# Altium PCB 400532.PcbDoc
Units mm, origin at the board's own origin, x right, y up, seen from the top; angles counter-clockwise.
Board outline 17.88 x 49.28 mm, 2 copper layers (Top Layer, Bottom Layer), stack 1.001 mm thick; 11 components, 19 nets, 61 pads, 81 vias.
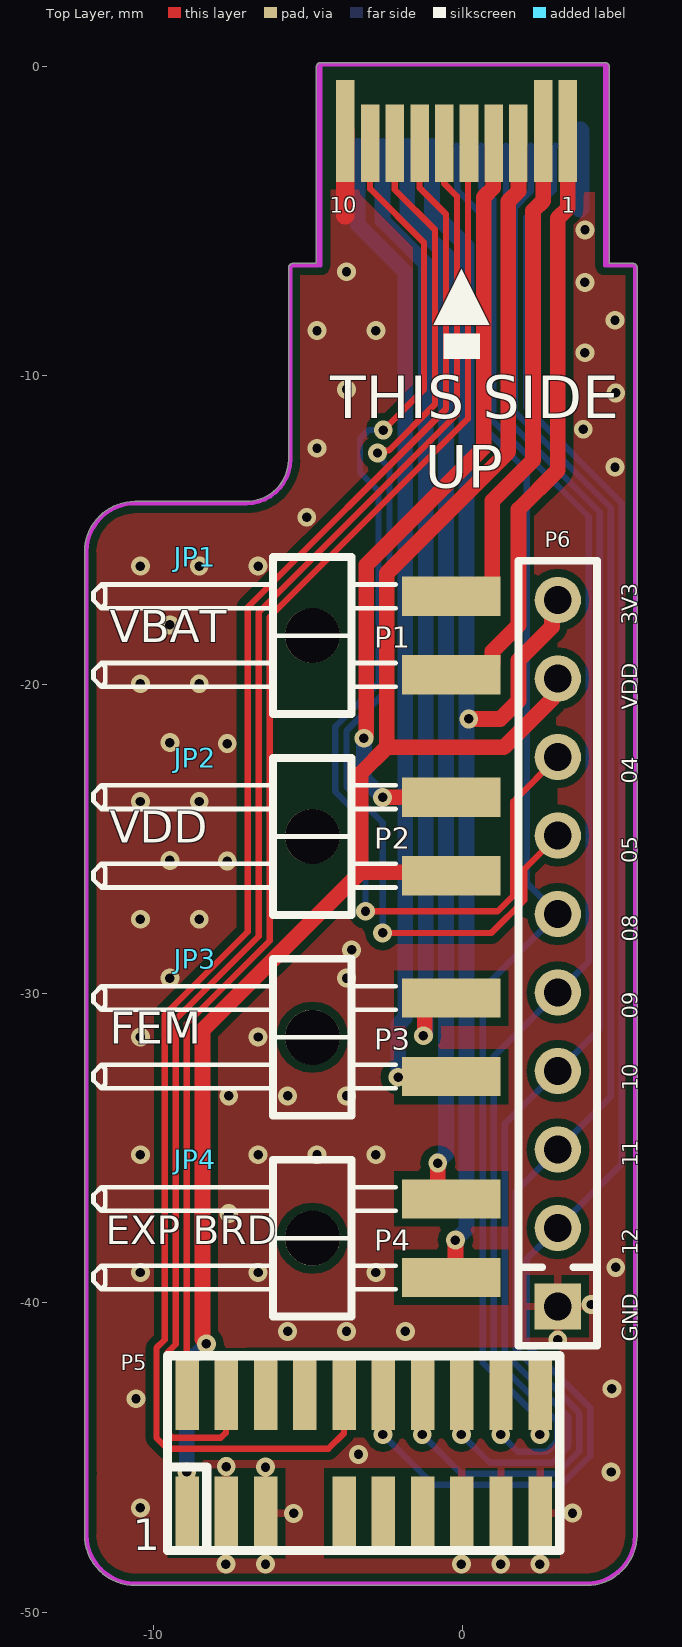
[diagram p0: Top Layer view]
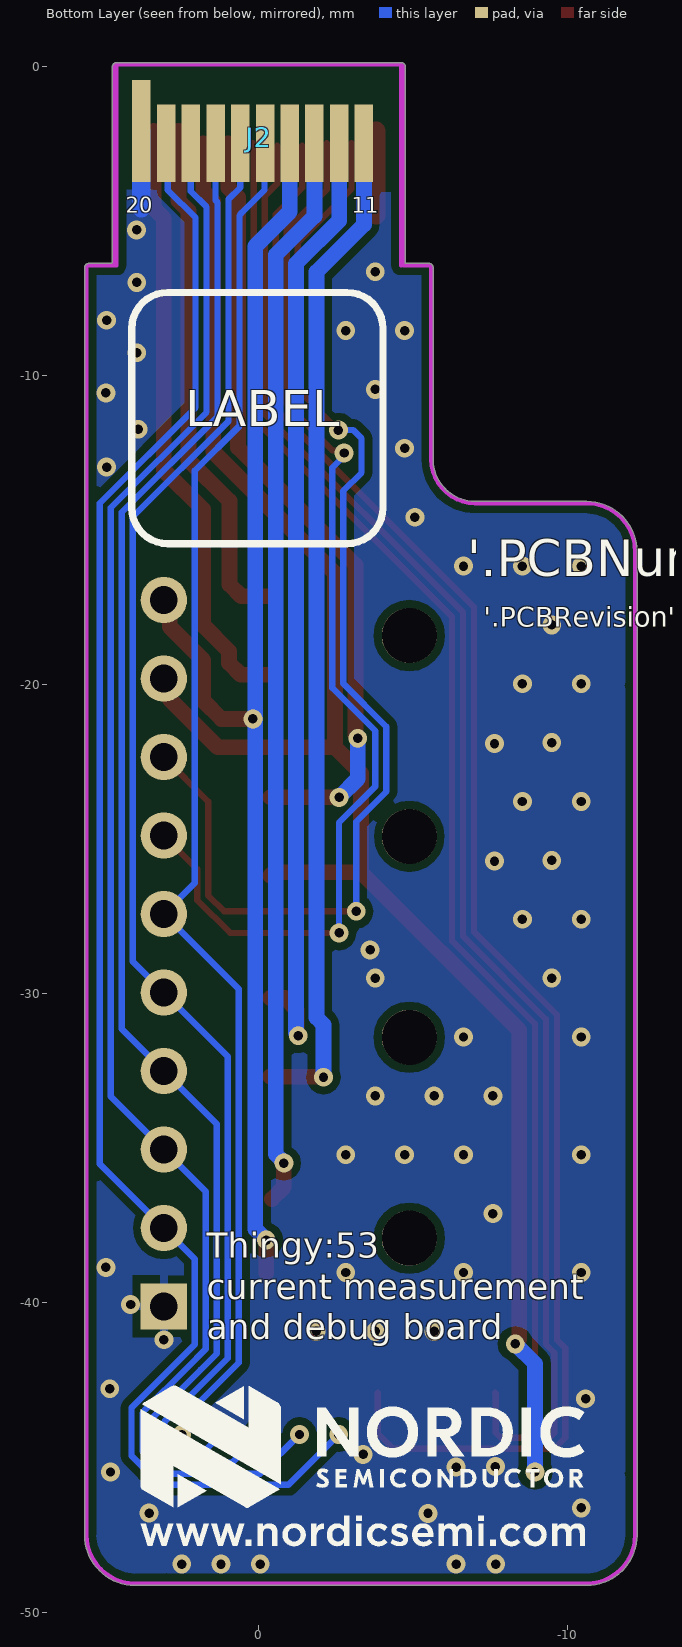
[diagram p1: Bottom Layer view, seen from below]
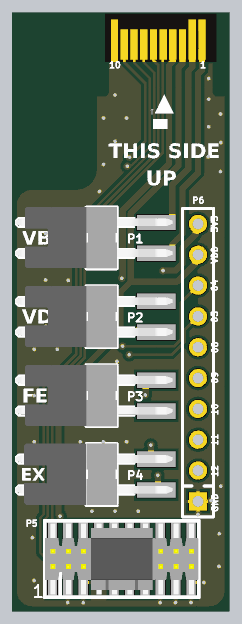
[diagram p2: 3D render of the assembled board from above, using the file's embedded part models]

## Layer stack, top to bottom
Top Solder: solder mask 0.0102, Solder Resist, Dk 3.5
Top Layer: signal copper 0.0356
Dielectric1: core 0.93, FR-4 Halogen Free, Dk 4.8
Bottom Layer: signal copper 0.0356
Bottom Solder: solder mask 0.0102, Solder Resist, Dk 3.5

## Board outline
-12.24,-47.511 cw(c-12.177,-47.506) -12.24,-47.506 -12.24,-15.694 cw(c-12.177,-15.694) -12.24,-15.689 cw(c-10.6,-15.7) -10.611,-14.06 cw(c-10.606,-14.123) -10.606,-14.06 -7,-14.06 cw(c-7,-14.123) -6.995,-14.06 cw(c-6.995,-14.124) -6.995,-14.06 ccw(c-7,-12.7) -5.64,-12.723 -5.64,-6.5 cw(c-5.5,-6.5) -5.5,-6.36 -4.74,-6.36 -4.74,0 cw(c-4.6,0) -4.6,0.14 4.6,0.14 cw(c4.6,0) 4.74,0 4.74,-6.36 5.5,-6.36 cw(c5.5,-6.5) 5.64,-6.5 5.64,-12.005 5.64,-47.506 cw(c5.577,-47.506) 5.64,-47.511 cw(c4,-47.5) 4.011,-49.14 cw(c4.006,-49.077) 4.006,-49.14 -10.591,-49.14 cw(c-10.591,-49.077) -10.599,-49.14 cw(c-10.606,-49.076) -10.606,-49.14 cw(c-10.6,-47.5)

## Design rules (kind name [scope] priority, off if disabled: settings)
Clearance ANT_Clerance [InNet('ANT')] p1: gap=0.127 ignorepadtopadclearanceinfootprint=FALSE except(0: Arc-Hole Track-Hole SMDPad-Hole THPad-Hole Via-Hole Fill-Hole Poly-Hole Region-Hole Text-Hole)
Clearance Polygon_Clearance [(InNamedPolygon('Top_Layer-GND')) or (InNamedPolygon('Bottom_Layer-GND'))] p2: gap=0.254 ignorepadtopadclearanceinfootprint=FALSE except(0: Arc-Hole Track-Hole SMDPad-Hole THPad-Hole Via-Hole Fill-Hole Poly-Hole Region-Hole Text-Hole)
Clearance [All] p3: gap=0.152 ignorepadtopadclearanceinfootprint=FALSE except(0: Arc-Hole Track-Hole SMDPad-Hole THPad-Hole Via-Hole Fill-Hole Poly-Hole Region-Hole Text-Hole)
ComponentClearance [All] p1 off: gap=0.254 collisioncheckmode=3 verticalgap=0.254 showdistances=FALSE
DiffPairsRouting [All] p1: maxlimit=0.15 minlimit=0.15 mostfreqgap=0.15 toplayer_minwidth=0.381 toplayer_maxwidth=0.381 toplayer_prefwidth=0.381 bottomlayer_minwidth=0.381 bottomlayer_maxwidth=0.381 bottomlayer_prefwidth=0.381 maxuncoupledlength=12.7
FabricationTestPointUsage TestPointUsage [All] p1: valid=0 allowmultiple=FALSE
FabricationTestpoint Testpoint [All] p1: side=3 testpointundercomponent=TRUE minsize=1.016 maxsize=2.54 preferedsize=1.524 minholesize=0 maxholesize=1.016 preferedholesize=0.813 testpointgrid=0.025 allowsidetop=TRUE allowsidebottom=TRUE usegrid=TRUE gridtolerance=0
Height [All] p1 off: minheight=0 maxheight=25.4 prefheight=12.7
HoleSize [All] p1: absolutevalues=TRUE maxlimit=5 minlimit=0.305 maxpercent=80.000 minpercent=20.000
MinimumAnnularRing [All] p1 off: minimumring=0.152
PolygonConnect PolygonConnect_1 [isVia and innet(gnd)] p1: connectstyle=Direct reliefconductorwidth=0.254 reliefentries=4 polygonreliefangle="90 Angle" airgapwidth=0.254
PolygonConnect [All] p2: connectstyle=Relief reliefconductorwidth=0.254 reliefentries=4 polygonreliefangle="90 Angle" airgapwidth=0.254
RoutingVias [All] p1: holewidth=0.305 width=0.61 viastyle="Through Hole" minholewidth=0.305 minwidth=0.61 maxholewidth=0.305 maxwidth=0.61
SilkToSolderMaskClearance SilkscreenOverComponentPads [IsPad] p1: minsilkscreentomaskgap=0.254 clearancetoexposedcopper=TRUE
SolderMaskExpansion [All] p1: expansion=0.076 istentingtop=FALSE
Width [All] p1: maxlimit=2.54 minlimit=0.203 preferedwidth=0.381
23 further rules are at their usual default settings.

## Components (designator, comment, footprint, x,y, rotation, side; value= is the part's Value field where it differs from the comment)
J2 "Card Edge, 0.8mm" "10056847-101LF Mating Board" 0,0.075 r180 bottom locked
JP1 "Shunt 2.54mm" Shunt_2.54mm_Horizontal -8.65,-15.863 r270 top locked
JP2 "Shunt 2.54mm" Shunt_2.54mm_Horizontal -8.65,-22.363 r270 top locked
JP3 "Shunt 2.54mm" Shunt_2.54mm_Horizontal -8.65,-28.863 r270 top locked
JP4 "Shunt 2.54mm" Shunt_2.54mm_Horizontal -8.65,-35.363 r270 top locked
P1 "Pin List 1x2, Angled" LIST_ANG_1x2-SMD-2.54MM -0.372,-18.403 r270 top locked
P2 "Pin List 1x2, Angled" LIST_ANG_1x2-SMD-2.54MM -0.372,-24.903 r270 top locked
P3 "Pin List 1x2, Angled" LIST_ANG_1x2-SMD-2.54MM -0.372,-31.403 r270 top locked
P4 "Pin List 1x2, Angled" LIST_ANG_1x2-SMD-2.54MM -0.372,-37.903 r270 top locked
P5 "Pin Header 2x10, 1.27mm, SWD" HDR_2x10-SMD-1.27mm-K-SWD -3.209,-44.859 r0 top locked
P6 "Pin List 1x10" LIST_1x10-NC 3.074,-28.683 r90 top locked

## Footprints (in the part's own frame and the unit in brackets; to place one, negate y for a bottom-side part, rotate by r counter-clockwise, add the part's x,y. Pads: shape width x height; smd on the part's side, far side on the other; paste and mask are expansions set on the pad)
"10056847-101LF Mating Board" [mm]
  rect 0.6x3.3 smd far side paste-1 mask+0.025: 1(-3.4,-2.15) 2(-2.6,-2.15) 10(3.8,-2.15)
  rect 0.6x2.5 smd far side paste-1 mask+0.025: 3(-1.8,-2.55) 4(-1,-2.55) 5(-0.2,-2.55) 6(0.6,-2.55) 7(1.4,-2.55) 8(2.2,-2.55) 9(3,-2.55)
  rect 0.6x2.5 smd paste-1 mask+0.025: 11(3.4,-2.55) 12(2.6,-2.55) 13(1.8,-2.55) 14(1,-2.55) 15(0.2,-2.55) 16(-0.6,-2.55) 17(-1.4,-2.55) 18(-2.2,-2.55) 19(-3,-2.55)
  rect 0.6x3.3 smd paste-1 mask+0.025: 20(-3.8,-2.15)
  Keep-Out Layer lines w0.127: 4.6,-6.5 4.6,0 -4.6,0 -4.6,-6.5
HDR_2x10-SMD-1.27mm-K-SWD [mm] "SMT MICRO HEADER, (1,27) .050\" Keying Shroud w/ pin 7 removed"
  rect 0.76x2.4 smd: 1(-5.715,-1.95) 2(-5.715,1.95) 3(-4.445,-1.95) 4(-4.445,1.95) 5(-3.175,-1.95) 6(-3.175,1.95) 8(-1.905,1.95) 9(-0.635,-1.95) 10(-0.635,1.95) 11(0.635,-1.95) 12(0.635,1.95) 13(1.905,-1.95) 14(1.905,1.95) 15(3.175,-1.95) 16(3.175,1.95) 17(4.445,-1.95) 18(4.445,1.95) 19(5.715,-1.95) 20(5.715,1.95)
  silkscreen extent -6.35,-3.15 6.35,3.15, body extent -6.31,-2.92 6.31,2.92, height 6.98
LIST_1x10-NC [mm] "Pin List, 2.54mm through hole"
  rect 1.5x1.5 hole 0.9: 1(-11.43,0)
  round 1.5 hole 0.9: 2(-8.89,0) 3(-6.35,0) 4(-3.81,0) 5(-1.27,0) 6(1.27,0) 7(3.81,0) 8(6.35,0) 9(8.89,0) 10(11.43,0)
  silkscreen extent -12.7,-1.27 12.7,1.27
LIST_ANG_1x2-SMD-2.54MM [mm] "Pin List, 2.54mm, Surface Mount, Angled"
  round 1.78 hole 1.78 unplated: 0(0,-4.496)
  rect 1.27x3.18 smd: 1(-1.27,0) 2(1.27,0)
  silkscreen extent -2.54,-11.58 2.54,-1.8, body extent -2.56,-11.61 2.52,1.35, height 3.03
Shunt_2.54mm_Horizontal [mm]
  body extent 0,-2.54 5.03,2.54, height 3.09

## Part data
J2: library part "10056847-101LF Mating Board", "0.8mm pitch, dual edge, card edge connector", Manufacturer=N.A., Artikkelnr Noca=N.A., Component Class=Connectors, ComponentLink1Description=Datasheet, ComponentLink1URL=https://www.amphenol-icc.com/media/wysiwyg/files/drawing/10056847.pdf, ComponentLink2Description="Supplier link", ComponentLink2URL=N.A., Footprint Doc="10056847-101LF Mating Board", HelpURL=N.A., LatestRevisionDate=2018-05-09, Manufacturer Part Number=N.A., Note=N.A., Pad Count=20, Part Number="10056847-101LF Mating Board", Part number IPS=N.A., PartId=100500634, Published=2018-05-09, Supplier 1=N.A., Supplier 2=N.A., Supplier Part Number 1=N.A., Supplier Part Number 2=N.A.
JP1 JP2 JP3 JP4: library part "SHUNT JUMPER 2.54mm Black Tin", "Shunt Jumper 2.54mm Black, open top", Manufacturer=Samtec, Manufacturer Part Number=SNT-100-BK-T, Part number IPS=N.A., Supplier Part Number 1=SAM8860-ND, Artikkelnr Noca=N.A., Author=masi, Component Class=Connectors, ComponentLink1Description=Datasheet, ComponentLink1URL=N.A., ComponentLink2Description="Supplier link", ComponentLink2URL=N.A., Footprint Doc="SHUNT JUMPER 2.54mm", HelpURL=http://suddendocs.samtec.com/catalog_english/snt.pdf, LatestRevisionDate=2021-06-28, Note="SHUNT JUMPER .1\" BLACK TIN, h=6.10mm, w=5.08mm", Pad Count=2, Part Number="SHUNT JUMPER 2.54mm Black Tin", Part number Norautron=N.A., Published=2021-06-28, Supplier 1=Digi-Key, Supplier 2=Mouser, Supplier Part Number 2=200-SNT100BKT
P1 P2 P3 P4: library part "Pin List Ang 1x2 SMD, 2.54mm", "Pin List 1x2, 2.54mm (100mil), Right Angled, SMD", Manufacturer=W-CON, Manufacturer Part Number=1125B-1102S0Z135R2, Part number IPS=00000009972, Artikkelnr Noca=55010023, Component Class=Connectors, ComponentLink1Description=Datasheet, ComponentLink1URL=N.A., ComponentLink2Description="Supplier link", ComponentLink2URL=N.A., Footprint Doc=LIST_ANG_1x2-SMD-2.54MM, HelpURL=\\hizz\pro\app9717\Datasheet\connectors\W-CON\1125B-11XXXXZXXXXX.pdf, LatestRevisionDate=2016-05-26, Note=N.A., Pad Count=2, Part Number="Pin List Ang 1x2 SMD, 2.54mm", PartId=100500354, Published=2016-01-22, Supplier 1=Cabcon, Supplier 2=Samtec, Supplier Part Number 1=1125B-1102S0Z135R2, Supplier Part Number 2=TSM-102-01-L-SH-A
P5: library part "Pin Header 2x10 SMD, 1.27mm, KS, SWD", "Pin Header 2x10, 1.27mm (50mil), SMD, Keying Shroud, Removed Pin 7", Manufacturer=W-CON, Manufacturer Part Number=3132-20MS0BK00R1, Part number IPS=N.A., Artikkelnr Noca=N.A., Component Class=Connectors, ComponentLink1Description=Datasheet, ComponentLink1URL=N.A., ComponentLink2Description="Supplier link", ComponentLink2URL=N.A., Footprint Doc=HDR_2x10-SMD-1.27mm-SWD, HelpURL=N.A., LatestRevisionDate=2017-10-23, Note=N.A., Pad Count=20, Part Number="Pin Header 2x10 SMD, 1.27mm, KS, SWD", PartId=100500280, Published=2014-05-23, Supplier 1=Cabcon, Supplier 2=Digi-Key, Supplier Part Number 1=3132-20MS0BK00R1, Supplier Part Number 2=FTSH-110-01-F-DV-K-ND
P6: library part "Pin List 1x10, N.C.", "Pin List 1x10, 2.54mm (100mil)", Manufacturer=N.A., Artikkelnr Noca=N.A., Assembly="Not mounted", Component Class=Connectors, ComponentLink1Description=Datasheet, ComponentLink1URL=N.A., ComponentLink2Description="Supplier link", ComponentLink2URL=N.A., Footprint Doc=LIST_1x10, HelpURL=N.A., LatestRevisionDate=2017-10-23, Manufacturer Part Number=N.A., Note=N.A., Pad Count=10, Part Number="Pin List 1x10, N.C.", Part number IPS=N.A., PartId=100500336, Published=2017-10-23, Supplier 1=N.A., Supplier 2=N.A., Supplier Part Number 1=N.A., Supplier Part Number 2=N.A.

## Via types
v1: diameter 0.61, hole 0.305, Top Layer to Bottom Layer, tented both sides, 81 vias

## Nets (pads, with @x,y where several pads share a name; then routed paths per layer and width w, separated by ;. In a path a pad name is that pad's centre, name@x,y a point inside that pad or via, vN(x,y) a via of type N, cw(c..) or ccw(c..) an arc to the next point about the centre after c; other vN are vias at no path point)
3V3: J2.14 P4.2 P6.10 | length 42.8
  Top Layer w0.508: P4.2@-0.238,-39.038 v1(-0.238,-37.965) ; v1@0.166,-21.1 1.213,-21.1 1.8,-20.513 1.8,-19.2 2.885,-18.115 2.885,-17.442 P6.10
  Bottom Layer w0.508: J2.14@-1,-2.55 -1,-4.69 0.118,-5.807 v1@0.118,-21.1 ; v1(-0.238,-37.965) 0.118,-37.61 0.118,-21.201 0.172,-21.147 0.172,-21.127 v1@0.144,-21.1
  other v1: 0.191,-21.1
GND: J2.10 J2.20 P5.3 P5.5 P5.15 P5.17 P5.19 P6.1 | length 5.2
  Top Layer w0.6: -3.8,-4.8 J2.10
  Bottom Layer w0.6: 3.8,-4.575 J2.20
  other v1: -7.664,-48.45 -6.384,-48.45 -0.044,-48.45 1.226,-48.45 2.494,-48.45 -5.475,-46.809 3.55,-46.8 -10.432,-46.633 4.8,-45.469 -6.384,-45.31 -7.654,-45.294 -3.375,-44.9 -10.575,-43.1 4.825,-42.775 3.074,-41.188 -5.67,-40.918 -3.765,-40.918 -1.86,-40.918 4.15,-40.05 -10.432,-39.013 -6.622,-39.013 -2.812,-39.013 4.95,-38.85 -7.575,-37.108 -10.432,-35.203 -6.622,-35.203 -4.717,-35.203 -2.812,-35.203 -7.575,-33.298 -5.67,-33.298 -3.765,-33.298 -10.432,-31.393 -6.622,-31.393 -9.48,-29.488 -3.765,-29.488 -3.6,-28.575 -10.432,-27.583 -8.527,-27.583 -7.625,-25.7 -9.48,-25.678 -10.432,-23.773 -8.527,-23.773 -7.625,-21.9 -9.48,-21.868 -10.432,-19.963 -8.527,-19.963 -9.48,-18.058 -10.432,-16.153 -8.527,-16.153 -6.622,-16.153 -5.05,-14.575 4.925,-12.95 -4.717,-12.343 3.9,-11.725 4.95,-10.55 -3.765,-10.438 3.952,-9.253 -4.717,-8.533 -2.812,-8.533 4.925,-8.2 3.95,-6.975 -3.765,-6.628 3.954,-5.275
P0.04/AIN0: J2.9 P6.8 | length 38
  Top Layer w0.203: v1(-3.15,-27.325) 1.125,-27.325 1.633,-26.817 1.633,-23.774 P6.8 ; J2.9 -3,-3.95 -1.256,-5.694 -1.256,-10.437 v1(-2.575,-11.755)
  Bottom Layer w0.203: v1(-3.15,-27.325) -3.15,-24.425 -4.125,-23.45 -4.125,-21.347 -2.731,-19.953 -2.731,-13.722 -3.325,-13.127 -3.325,-12.025 -3.05,-11.75 -2.58,-11.75 v1(-2.575,-11.755)
P0.05/AIN1: J2.8 P6.7 | length 35.8
  Top Layer w0.203: v1(-2.76,-12.495) -2.682,-12.417 -2.395,-12.417 -0.901,-10.923 -0.901,-5.274 -2.2,-3.975 J2.8 ; v1(-2.597,-28.025) 0.928,-28.025 1.989,-26.964 1.989,-25.958 P6.7
  Bottom Layer w0.203: v1(-2.76,-12.495) -2.76,-12.587 -2.375,-12.972 -2.375,-14.25 ; v1(-2.597,-28.025) -2.591,-28.019 -2.591,-24.459 -3.762,-23.287 -3.762,-21.487 -2.372,-20.097 -2.372,-14.25
P0.08/TRACEDATA3: J2.15 P5.20 P6.6 | length 44.8
  Bottom Layer w0.203: J2.15@-0.2,-2.55 -0.18,-2.57 -0.18,-3.986 0.566,-4.732 cw(c0.422,-4.875) 0.626,-4.875 0.626,-11.62 2.07,-13.064 2.07,-26.409 P6.6 0.648,-29.839 0.648,-41.932 1.608,-42.892 2.434,-43.718 cw(c2.291,-43.862) 2.494,-43.862 v1(2.494,-44.256)
P0.09/TRACEDATA2: J2.16 P5.18 P6.5 | length 47.7
  Bottom Layer w0.203: J2.16@0.6,-2.55 0.6,-3.905 0.981,-4.286 0.981,-11.465 4.078,-14.562 4.078,-28.949 P6.5 1.004,-32.023 1.004,-41.784 2.687,-43.468 3.053,-43.834 3.053,-44.403 cw(c2.85,-44.403) 2.993,-44.547 2.725,-44.815 1.784,-44.815 v1(1.226,-44.256)
P0.10/TRACEDATA1: J2.17 P5.16 P6.4 | length 49.6
  Bottom Layer w0.203: v1(-0.044,-44.256) 0.87,-45.171 2.893,-45.171 3.349,-44.715 ccw(c3.205,-44.571) 3.408,-44.571 3.408,-43.686 1.886,-42.164 1.359,-41.637 1.359,-34.208 P6.4 4.434,-31.133 4.434,-14.415 1.337,-11.318 1.337,-4.386 1.4,-4.323 J2.17@1.4,-2.55
P0.11/TRACEDATA0: J2.18 P5.14 P6.3 | length 51.8
  Bottom Layer w0.203: v1(-1.314,-44.256) -0.044,-45.526 3.04,-45.526 3.764,-44.802 3.764,-43.623 ccw(c3.561,-43.623) 3.704,-43.479 2.35,-42.125 1.715,-41.49 1.715,-36.392 4.79,-33.317 4.79,-14.267 1.692,-11.17 1.692,-4.533 2.2,-4.026 J2.18@2.2,-2.55
P0.12/TRACECLK: J2.19 P5.12 P6.2 | length 54
  Bottom Layer w0.203: v1(-2.584,-44.256) -0.959,-45.882 3.188,-45.882 4.12,-44.95 4.12,-43.392 3.851,-43.123 2.07,-41.343 2.07,-38.577 P6.2 5.145,-35.502 5.145,-14.12 2.048,-11.023 2.048,-4.884 2.946,-3.986 2.946,-2.604 J2.19@3,-2.55
RESET: J2.7 P5.10 | length 53.8
  Top Layer w0.203: -9.646,-41.188 -9.914,-41.456 -9.914,-44.361 -9.557,-44.719 -4.348,-44.719 -3.844,-44.214 P5.10 ; -9.646,-41.181 -9.646,-30.671 -6.961,-27.987 -6.961,-17.486 -0.545,-11.07 -0.545,-4.767 -1.4,-3.912 J2.7@-1.4,-2.55
SWDCLK: J2.6 P5.4 | length 49
  Top Layer w0.203: P5.4 -7.664,-42.919 -7.664,-44.199 -7.829,-44.363 -9.409,-44.363 -9.558,-44.214 -9.558,-41.604 -9.29,-41.336 -9.29,-30.819 -6.606,-28.134 -6.606,-17.653 -0.189,-11.237 -0.189,-4.186 -0.6,-3.775 J2.6@-0.6,-2.55
SWDIO: J2.5 P5.2 | length 44.2
  Top Layer w0.203: P5.2 -8.934,-42.899 -8.934,-30.966 -6.25,-28.282 -6.25,-17.8 0.166,-11.384 0.166,-2.63 0.2,-2.596 J2.5
V_Bat: J2.2 P1.1 | length 16.8
  Top Layer w0.508: P1.1 0.569,-17.133 0.95,-16.752 0.95,-14.05 2.274,-12.726 2.274,-4.657 2.6,-4.332 J2.2
VDD_EXP_BRD: J2.13 P4.1 | length 34.9
  Top Layer w0.508: v1(-0.809,-35.473) -0.809,-36.252 P4.1@-0.428,-36.633
  Bottom Layer w0.508: J2.13@-1.8,-2.55 -1.8,-4.829 -0.543,-6.087 -0.543,-35.179 -0.809,-35.445 v1(-0.809,-35.473)
VDD_nRF53: J2.4 P2.1 | length 25.4
  Top Layer w0.508: v1(-3.2,-21.725) -3.2,-21.697 -3.125,-21.623 -3.125,-16.116 0.674,-12.317 0.674,-4.217 0.99,-3.901 0.99,-2.485 J2.4 ; v1@-2.597,-23.637 -0.376,-23.637 P2.1
  Bottom Layer w0.508: v1(-3.2,-21.725) -3.2,-23.038 v1(-2.597,-23.641)
VDD_nRF21540: J2.12 P3.1 | length 31.3
  Top Layer w0.508: v1(-1.275,-31.35) -1.275,-31.323 -1.229,-31.276 -1.229,-30.514 -0.848,-30.133 P3.1
  Bottom Layer w0.508: J2.12@-2.6,-2.55 -2.6,-4.969 -1.203,-6.366 -1.203,-31.246 v1@-1.311,-31.354
VLi-Ion: J2.1 P1.2 | length 19.7
  Top Layer w0.508: P1.2 0.583,-19.673 0.964,-19.292 0.964,-18.908 1.8,-18.072 1.8,-14.325 3.074,-13.051 3.074,-4.901 3.4,-4.575 J2.1
VOUTB_1: J2.3 P2.2 P5.1 P6.9 | length 57.3
  Top Layer w0.508: v1(-8.297,-41.324) -8.297,-41.297 -8.426,-41.167 -8.426,-31.176 -3.308,-26.058 ; P2.2 -0.486,-26.058 -3.308,-26.058 ; J2.3 1.8,-4.025 1.474,-4.351 1.474,-12.451 -2.465,-16.39 -2.465,-22.02 ; P6.9 2.885,-19.982 2.885,-20.465 1.33,-22.02 -2.465,-22.02 ; -3.308,-26.058 -3.308,-22.864 -2.465,-22.02
  Bottom Layer w0.508: v1(-8.934,-45.469) -8.934,-41.962 v1(-8.297,-41.324)
VOUTB_2: J2.11 P3.2 | length 32.6
  Top Layer w0.508: v1(-2.092,-32.693) -2.082,-32.683 -0.382,-32.683 P3.2
  Bottom Layer w0.508: J2.11@-3.4,-2.55 -3.4,-5.103 -1.864,-6.64 -1.864,-30.764 -2.092,-30.992 v1(-2.092,-32.693)
pads on no net: P1.0 P2.0 P3.0 P4.0 P5.6 P5.8 P5.9 P5.11 P5.13

## Polygon pours and split planes (outlines as drawn)
GND on Bottom Layer "Bottom_Layer-GND" (solid, remove dead copper, pour order 50): -12.24,-47.511 cw(c-12.177,-47.506) -12.24,-47.506 -12.24,-14.997 cw(c-12.177,-14.997) -12.24,-14.992 cw(c-10.6,-15) -10.611,-13.36 cw(c-10.606,-13.423) -10.606,-13.36 -7,-13.36 cw(c-7,-13.423) -6.995,-13.36 cw(c-6.995,-13.424) -6.995,-13.36 ccw(c-7,-12) -5.64,-12.01 cw(c-5.577,-12.005) -5.64,-12.005 -5.64,-6.5 cw(c-5.5,-6.5) -5.5,-6.36 -4.74,-6.36 -4.74,0 cw(c-4.6,0) -4.6,0.14 4.6,0.14 cw(c4.6,0) 4.74,0 4.74,-6.36 5.5,-6.36 cw(c5.5,-6.5) 5.64,-6.5 5.64,-12.005 5.64,-47.506 cw(c5.577,-47.506) 5.64,-47.511 cw(c4,-47.5) 4.011,-49.14 cw(c4.006,-49.077) 4.006,-49.14 -10.591,-49.14 cw(c-10.591,-49.077) -10.599,-49.14 cw(c-10.606,-49.076) -10.606,-49.14 cw(c-10.6,-47.5)
GND on Top Layer "Top_Layer-GND" (solid, remove dead copper, pour order 49): -12.24,-47.511 cw(c-12.177,-47.506) -12.24,-47.506 -12.24,-14.997 cw(c-12.177,-14.997) -12.24,-14.992 cw(c-10.6,-15) -10.611,-13.36 cw(c-10.606,-13.423) -10.606,-13.36 -7,-13.36 cw(c-7,-13.423) -6.995,-13.36 cw(c-6.995,-13.424) -6.995,-13.36 ccw(c-7,-12) -5.64,-12.01 cw(c-5.577,-12.005) -5.64,-12.005 -5.64,-6.5 cw(c-5.5,-6.5) -5.5,-6.36 -4.74,-6.36 -4.74,0 cw(c-4.6,0) -4.6,0.14 4.6,0.14 cw(c4.6,0) 4.74,0 4.74,-6.36 5.5,-6.36 cw(c5.5,-6.5) 5.64,-6.5 5.64,-12.005 5.64,-47.506 cw(c5.577,-47.506) 5.64,-47.511 cw(c4,-47.5) 4.011,-49.14 cw(c4.006,-49.077) 4.006,-49.14 -10.591,-49.14 cw(c-10.591,-49.077) -10.599,-49.14 cw(c-10.606,-49.076) -10.606,-49.14 cw(c-10.6,-47.5)

## Keep-outs
Keep-Out Layer:
  lines w0.127: -12.176,-45.506 cw(c-12.1,-45.5) -12.177,-45.5 ; -12.177,-20 cw(c-12.1,-20) -12.176,-19.994 ; -10.606,-49.076 cw(c-10.6,-47.5) -12.176,-47.506 -12.177,-15.694 cw(c-10.6,-15.7) -10.606,-14.124 -7,-14.123 ; -10.591,-49.077 4.006,-49.077 ccw(c4,-47.5) 5.576,-47.506 5.577,-12.005 5.577,-6.5 ccw(c5.5,-6.5) 5.5,-6.423 4.677,-6.423 4.677,0 ccw(c4.6,0) 4.6,0.077 -4.6,0.077 ccw(c-4.6,0) -4.677,0 -4.677,-6.423 -5.5,-6.423 ccw(c-5.5,-6.5) -5.577,-6.5 -5.577,-12.705 ; -6.995,-14.124 ccw(c-7,-12.7) -5.576,-12.705 ; 3,-49.077 ccw(c3,-49) 3.006,-49.076

## Other copper
Top Layer:
  pour cut-out: 3.072,-23.978 3.072,-23.228 3.022,-23.228 3.025,-23.231 3.025,-23.969
  pour cut-out: 3.025,-21.45 3.025,-20.676 3.032,-20.67 2.997,-20.67 2.997,-21.456
  pour cut-out: 3.075,-18.875 3.074,-18.874 3.074,-18.1 2.997,-18.1 3,-18.103 3,-18.875
  pour cut-out: 3.954,-4.054 4.276,-4.054 4.276,-4.025 3.95,-4.025
Bottom Layer:
  pour cut-out: -3.954,-4.054 -4.3,-4.054 -4.3,-4.027 -4.301,-4.026 -3.954,-4.026

## Silkscreen, mask and mechanical layers (free items; w line width, h text height)
Top Overlay:
  rectangle: -0.619,-9.45 0.556,-8.625
  text "▲" at -0.963,-8.65 h3
  text "THIS SIDE" at -4.295,-11.825 h2.36
  text "UP" at -1.225,-14.075 h2.36
  text "3V3" at 5.644,-18.044 h0.5 r90
  text "VBAT" at -11.431,-18.958 h1.78
  text "VDD" at 5.644,-20.802 h0.5 r90
  text "04" at 5.642,-23.203 h0.5 r90
  text "VDD" at -11.431,-25.444 h1.78
  text "05" at 5.642,-25.778 h0.5 r90
  text "08" at 5.656,-28.303 h0.5 r90
  text "09" at 5.656,-30.801 h0.5 r90
  text "FEM" at -11.431,-31.956 h1.78
  text "10" at 5.656,-33.131 h0.5 r90
  text "11" at 5.656,-35.598 h0.5 r90
  text "EXP BRD" at -11.55,-38.4 h1.59
  text "12" at 5.656,-38.457 h0.5 r90
  text "GND" at 5.656,-41.261 h0.5 r90
Bottom Overlay:
  drawing of 51 lines, arcs and shapes, not listed
  text "LABEL" at 2.375,-12.025 h2
  text "'.PCBNumber'" at -6.751,-16.866 h2.03
  text "'.PCBRevision'" at -7.272,-18.125 h0.64
  text "Thingy:53" at 1.683,-38.809 h1.4
  text "current measurement" at 1.683,-40.146 h1.4
  text "and debug board" at 1.683,-41.448 h1.4
Top Paste:
  text "↑" at -0.925,-8.575 h0.89
Board Outline:
  lines w0.127: -12.176,-45.506 cw(c-12.1,-45.5) -12.177,-45.5 ; -12.177,-20 cw(c-12.1,-20) -12.176,-19.994 ; -10.606,-49.076 cw(c-10.6,-47.5) -12.176,-47.506 -12.177,-15.694 cw(c-10.6,-15.7) -10.606,-14.124 -7,-14.123 ; -10.591,-49.077 4.006,-49.077 ccw(c4,-47.5) 5.576,-47.506 5.577,-12.005 5.577,-6.5 ccw(c5.5,-6.5) 5.5,-6.423 4.677,-6.423 4.677,0 ccw(c4.6,0) 4.6,0.077 -4.6,0.077 ccw(c-4.6,0) -4.677,0 -4.677,-6.423 -5.5,-6.423 ccw(c-5.5,-6.5) -5.577,-6.5 -5.577,-12.724 ; -6.995,-14.124 ccw(c-7,-12.7) -5.576,-12.705 ; 3,-49.077 ccw(c3,-49) 3.006,-49.076

## Text inside footprints (layer, text, board x,y; h text height)
J2: Top Overlay "1" at 3.2,-4.725 h0.5; Top Overlay "10" at -4.3,-4.725 h0.5; Placement "Card edge" at 3.05,0.725 h1.57; PCB Info "0.016in [0.4mm]" at -11.307,15.105 h2.29; PCB Info "45" at -11.348,47.617 h2.29; PCB Info "o" at -15.475,50.157 h1.22; PCB Info "DETAIL A" at 6.35,61.589 h3.81; PCB Info "0.012in [0.3mm]" at 31.183,33.115 h2.29; PCB Info "SEE DETAIL A" at 22.572,-1.051 h1.91; Bottom Overlay "20" at 4.3,-4.725 h0.5; Bottom Overlay "11" at -3,-4.725 h0.5
P5: Top Overlay "1" at -10.677,-48.009 h1.02